# Altium PCB SWMD_21DD_ LV_DR_Brush_V1.1.pcbdoc (part 2 of 2)
Units mm, origin at the board's own origin, x right, y up, seen from the top; angles counter-clockwise.
Board outline 127.72 x 40.81 mm, 4 copper layers (Top Layer, MidLayer1, MidLayer2, Bottom Layer); 125 components, 86 nets, 396 pads, 310 vias.
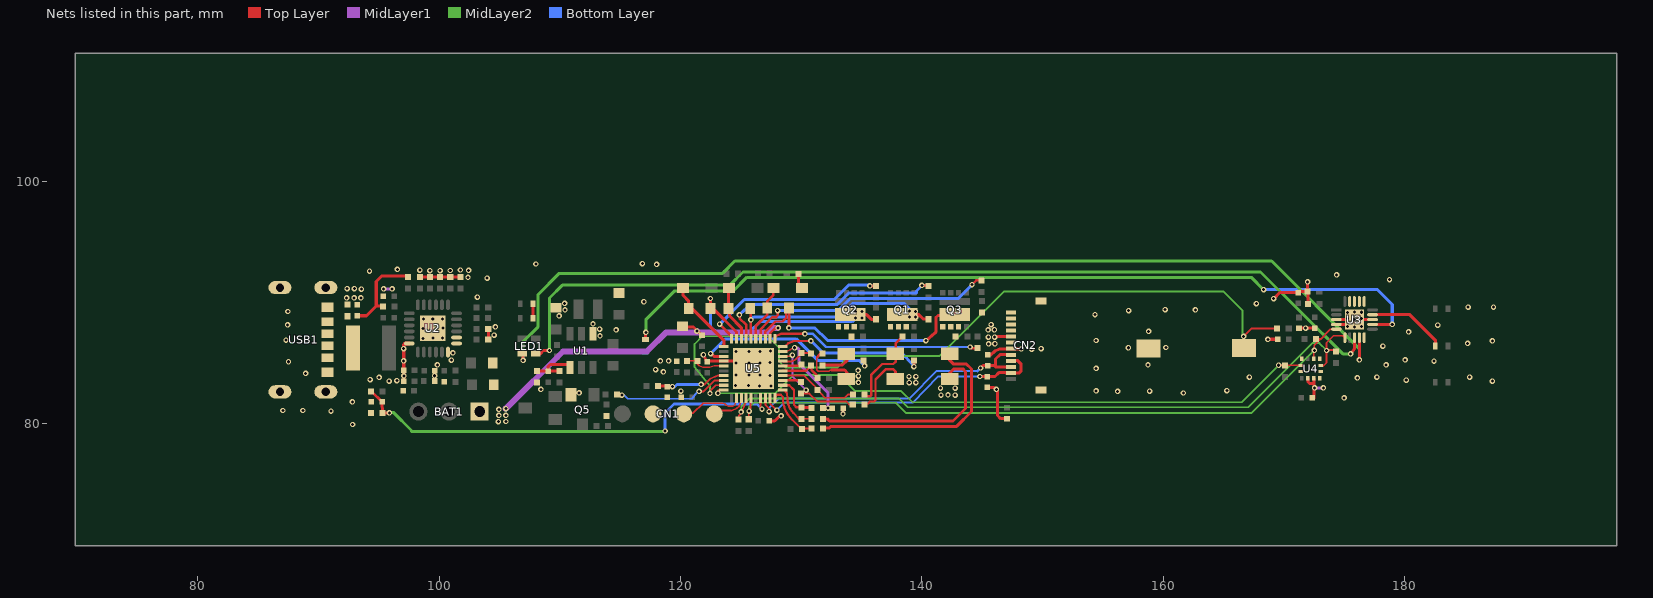
[diagram p4: the nets of this part, all layers, seen from the top]

## Via types
v1: diameter 0.45, hole 0.25, Top Layer to Bottom Layer, 310 vias

## Nets (pads, with @x,y where several pads share a name; then routed paths per layer and width w, separated by ;. In a path a pad name is that pad's centre, name@x,y a point inside that pad or via, vN(x,y) a via of type N, cw(c..) or ccw(c..) an arc to the next point about the centre after c; other vN are vias at no path point) (continued)
$$$39: LED1.1 U3.8 | length 77.2
  Top Layer w0.25: LED1.1@108.008,85.783 108.337,85.783 108.37,85.75 108.65,86.03 v1(109.14,86.03) ; v1(175.52,85.76) 175.52,85.722 175.838,86.15 U3.8@175.838,87.096
  MidLayer2 w0.25: v1(109.14,86.03) 109.14,90.379 110.201,91.44 124.08,91.44 125.18,92.54 168.061,92.54 174.879,85.76 v1(175.52,85.76)
$$$40: LED1.4 U3.9 | length 81.5
  Top Layer w0.25: LED1.4@106.886,85.783 106.96,85.709 v1(106.96,85.21) ; U3.9@176.238,87.096 176.24,87.094 v1(176.24,85.26)
  MidLayer2 w0.25: v1(106.96,85.21) 106.96,86.77 108.2,88.01 108.2,90.68 109.95,92.43 123.49,92.43 124.5,93.44 168.98,93.44 176.24,86.18 v1(176.24,85.26)
$$$41: LED3.2 U3.14 | length 6.5
  Top Layer w0.25: U3.14@177.336,88.995 180.419,88.995 182.533,86.88 LED3.2@182.533,86.406
$$$42: LED5.2 U3.12 | length 69.2
  Top Layer w0.25: LED5.2@117.104,86.948 117.104,87.524 v1(117.12,87.54) ; U3.12@177.336,88.195 178.965,88.195 v1(178.97,88.19)
  MidLayer2 w0.25: v1(117.12,87.54) 117.12,88.581 119.519,90.98 124.38,90.98 125.49,92.09 167.29,92.09 v1(168.31,91.07)
  Bottom Layer w0.25: v1(168.31,91.07) 177.74,91.07 178.97,89.84 v1(178.97,88.19)
BUTTON: R30.2 SW1.1 U5.19 | length 122
  Top Layer w0.15: SW1.1@166.701,86.233 166.701,87.169 v1(166.66,87.21) 167.301,87.851 R30.2@169.434,87.851 ; v1@122.42,82.642 122.93,83.152 ; v1@122.42,82.642 122.44,82.46 v1@122.42,82.642 ; v1@122.42,82.642 122.93,83.152 ; 122.93,83.152 U5.19@123.582,83.152 122.93,83.152
  Top Layer w0.25: v1@122.44,82.46 v1(122.44,82.48) v1@122.44,82.46
  MidLayer2 w0.15: 121.16,84.64 122.44,83.1 ; 121.16,84.64 121.16,86.56 ; 121.16,84.64 122.44,83.1 ; 121.16,84.64 121.16,86.56 ; 121.16,86.56 121.81,87.21 ; 121.16,86.56 121.81,87.21 ; 121.81,87.21 127.21,87.21 ; 121.81,87.21 127.21,87.21 ; 122.44,83.1 v1(122.44,82.48) 122.44,83.1 ; 127.21,87.21 128.16,86.26 ; 127.21,87.21 128.16,86.26 ; 128.16,85.14 128.16,86.26 ; 128.16,85.14 128.68,84.62 ; 128.16,85.14 128.16,86.26 ; 128.16,85.14 128.68,84.62 ; 128.68,84.62 133.03,84.62 ; 128.68,84.62 133.03,84.62 ; 133.03,84.62 133.99,85.58 ; 133.03,84.62 133.99,85.58 ; 133.99,85.58 141.48,85.58 ; 133.99,85.58 141.48,85.58 ; 141.48,85.58 146.83,90.93 ; 141.48,85.58 146.83,90.93 ; 146.83,90.93 164.98,90.93 ; 146.83,90.93 164.98,90.93 ; 164.98,90.93 166.57,89.34 ; 164.98,90.93 166.57,89.34 ; v1@166.57,87.26 166.57,89.34 ; v1@166.57,87.26 v1@166.61,87.26 ; v1@166.57,87.26 166.57,89.34 ; v1@166.57,87.26 v1@166.61,87.26 ; v1@166.61,87.26 v1(166.66,87.21) v1@166.61,87.26
CAP: R36.2 R37.2 U5.15 | length 3.4
  Top Layer w0.12: R37.2@120.53,85.17 121.38,85.17 R36.2@121.39,85.16 121.36,85.13 121.36,84.97 121.56,84.769 121.849,84.65 122.42,84.65 122.79,84.752 U5.15@123.582,84.752
COM: Q3.5 Q3.6 Q3.7 R12.1 R19.1 R21.1 R25.1 RS1.1 RS2.1 RS3.2 | length 29.5
  Top Layer w0.12: 131.39,85.55 131.3,85.46 131.3,85.19 131.3,84.43 131.43,84.3 132.3,84.3 132.41,84.41 132.523,84.41
  Top Layer w0.2: R12.1@131.635,85.725 R12.1@131.77,85.8 ; R21.1@135.23,81.57 135.282,81.64 135.55,81.64 135.69,81.78 135.7,81.78 135.727,81.808 136.053,81.808 136.155,81.91 136.155,83.615 137.035,84.495 137.605,84.495 137.8,84.3
  Top Layer w0.25: 131.39,85.55 131.565,85.725 R12.1@131.635,85.725 ; R25.1@131.8,79.56 131.82,79.61 132.33,79.61 132.47,79.75 142.88,79.75 144.1,80.97 144.1,84.49 143.66,84.93 142.59,84.93 142.3,85.22 RS3.2@142.3,85.76 ; 132.523,84.41 133.6,84.41 133.81,84.15 133.73,84.07 RS2.1@133.73,83.655 ; RS1.1@137.8,83.66 137.8,84.3
  other v1: 138.95,83.37 139.5,83.37 134.73,83.39 138.93,83.86 139.49,83.86 134.73,83.91 134.72,84.39
DC-ADC: C30.2 R40.2 R41.1 U5.27 | length 37.4
  Top Layer w0.15: U5.27@126.632,82.102 126.632,81.21 v1(126.75,81.18)
  Top Layer w0.25: R41.1@94.35,82.63 94.43,82.6 95.2,81.85 C30.2@95.28,81.77 R40.2@95.31,80.85 95.32,80.86 v1(95.88,80.86)
  MidLayer2 w0.25: v1(95.88,80.86) 95.93,80.91 96.2,80.91 97.71,79.4 97.71,79.34 118.72,79.34 v1(118.72,79.36)
  Bottom Layer w0.25: v1(118.72,79.36) 118.72,80.86 119.45,81.59 126.34,81.59 v1(126.75,81.18)
FB: C8.2 RCB3.1 RCB7.2 U1.4 | length 4.3
  Top Layer w0.25: RCB7.2@108.11,84.34 108.14,84.33 RCB3.1@109.98,84.33 ; C8.2@109.03,84.31 109.03,84.7 109.21,84.88 110.66,84.88 110.84,84.7 U1.4@110.84,84.629
GND: BAT1.1 C2.1 C3.1 C4.1 C5.2 C6.2 C7.1 C9.2 C10.2 C12.2 C13.2 C14.2 C15.2 C16.1 C17.1 C18.1 C22.2 C23.2 C24.1 C25.2 C26.2 C27.1 C28.1 C29.2 C30.1 C31.2 C32.2 C33.2 C34.2 C35.2 CN1.2 CN2.0 CN2.0/2 CN2.6 LED6.2 LED7.2 Q5.2 R15.2 R20.2 R27.1 R40.1 R45.2 RCB6.2 RCB7.1 RCB8.2 RCB12.2 RCB13.2 RCB14.2 RCB15.2 RCB16.2 RCB17.2 RS3.1 SW1.2 U1.1 U2.0 U2.18 U2.24 U3.3 U3.4 U3.13 U3.13/2 U4.8 U4.9 U5.2 U5.14 U5.41 USB1.7 USB1.7/2 USB1.7/3 USB1.7/4 USB1.A12 USB1.B12 | length 131.1
  Top Layer w0.2: U5.2@127.432,87.21 127.432,87.482 127.9,87.95 v1@128.03,87.95 ; v1@128.03,87.95 128.09,87.95 v1@128.03,87.95
  Top Layer w0.22: v1@128.03,87.95 v1(128.08,87.9)
  Top Layer w0.25: C3.1@97.06,84.387 97.058,84.468 C3.1@97.06,84.47 ; RCB15.2@98.42,92.14 RCB16.2@101.77,92.14 ; RCB6.2@104.07,86.94 RCB8.2@104.07,87.82 ; LED7.2@107.768,88.7 LED6.2@107.768,89.9 ; C18.1@120.157,88.042 120.073,87.983 121.08,87.983 v1@121.35,87.714 ; C17.1@121.778,87.285 v1@121.35,87.714 ; U5.2@127.432,87.002 U5.2@127.432,87.21 ; R27.1@131.8,80.37 132.15,80.37 132.33,80.19 142.58,80.19 143.62,81.23 143.62,84.28 143.39,84.51 142.65,84.51 142.3,84.16 RS3.1@142.3,83.66 ; C34.2@145.42,82.97 145.97,82.97 146.27,82.67 146.27,80.65 146.54,80.38 C35.2@147.05,80.38 ; C33.2@145.46,85.68 145.643,85.68 145.683,85.64 146.071,86.008 146.43,86.157 CN2.6@147.38,86.177 ; C14.2@171.242,87.866 171.255,87.879 v1(171.8,87.88) C15.2@172.563,87.879 ; U4.8@171.97,83.727 171.97,83.46 172.15,83.281 172.47,83.281 ; R20.2@171.979,89.888 171.979,90.911 R15.2@171.962,90.928 ; C32.2@172.341,82.122 172.408,82.122 172.47,82.06 v1@172.47,82.93 ; U4.9@172.47,83.727 172.47,83.281 ; U3.4@174.339,88.195 175.39,88.195 U3.13@175.795,88.6 ; U3.3@174.339,88.595 175.79,88.595 U3.13@175.795,88.6 ; v1@121.35,87.714 v1(121.35,87.63) v1@121.35,87.714 ; v1@121.93,85.647 C25.2@122.125,85.174 ; v1@121.93,85.647 v1(121.89,85.68) v1@121.93,85.647 ; v1@121.93,85.647 C25.2@122.125,85.174 ; C25.2@122.125,85.174 C25.2@122.2,85.1 ; C25.2@122.125,85.174 C25.2@122.2,85.1 ; C25.2@122.2,85.1 122.252,85.152 U5.14@123.582,85.152 ; U5.14@123.582,85.152 U5.41@124.5,85.152 ; U5.14@123.582,85.152 U5.41@124.5,85.152 ; U5.41@124.5,85.152 U5.41@124.6,85.052 ; U5.41@124.5,85.152 U5.41@124.6,85.052 ; U5.41@124.6,85.052 v1(124.6,84.99) U5.41@124.6,85.052 ; 127.8,80.196 C28.1@127.357,80.196 127.8,80.196 ; 127.8,80.196 v1@128.21,80.606 ; 127.8,80.196 v1@128.21,80.606 ; v1@128.21,80.606 v1@128.326,80.606 ; v1@128.21,80.606 v1@128.326,80.606 ; v1@128.326,80.606 v1(128.33,80.61) v1@128.326,80.606 ; v1@133.48,80.78 133.48,81.252 v1@133.48,80.78 ; v1@133.48,80.78 v1(133.46,80.78) v1@133.48,80.78 ; CN2.6@147.38,86.177 v1@148.213,86.177 ; CN2.6@147.38,86.177 v1@148.213,86.177 ; v1@148.213,86.177 v1(148.23,86.16) v1@148.213,86.177 ; v1@168.663,86.964 C23.2@169.481,86.964 v1@168.663,86.964 ; v1@168.663,86.964 v1(168.66,86.96) v1@168.663,86.964 ; C31.2@171.193,90.831 169.65,90.831 C31.2@171.193,90.831 ; C31.2@171.193,90.831 171.291,90.928 R15.2@171.962,90.928 ; R15.2@171.962,90.928 v1@171.962,91.718 ; R15.2@171.962,90.928 v1@171.962,91.718 ; v1@171.962,91.718 v1(171.96,91.72) v1@171.962,91.718 ; v1@172.47,82.93 172.47,83.281 ; v1@172.47,82.93 v1(172.54,82.93) ; v1@172.47,82.93 172.47,83.281 ; v1@172.47,82.93 v1(172.54,82.93) ; v1@172.47,82.93 v1(172.54,82.93) ; U3.13@175.795,88.6 U3.13@175.838,88.595 ; U3.13@175.795,88.6 v1(175.81,88.6) U3.13@175.795,88.6 ; U3.13@175.795,88.6 U3.13@175.838,88.595 ; U3.13@175.795,88.6 U3.13@175.838,88.595 ; U3.13@175.795,88.6 U3.13@175.838,88.595 ; U3.13@176.49,88.595 U3.13/2@177.336,88.595 U3.13@176.49,88.595 ; U3.13@176.49,88.595 U3.13@176.49,88.62 ; U3.13@176.49,88.595 U3.13@176.49,88.62 ; U3.13@176.49,88.62 v1(176.42,88.69) U3.13@176.49,88.62 ; v1(169.14,90.32) 169.65,90.83 v1(169.14,90.32)
  Top Layer w0.3: C7.1@97.058,83.478 97.058,84.468 C3.1@97.06,84.387 ; C3.1@97.06,84.47 97.06,86.49 97.179,86.609 U2.18@97.524,86.609
  MidLayer1 w0.25: v1@128.07,87.91 v1(128.08,87.9) ; v1(95.4,91.14) v1(96.1,91.14) v1(95.4,91.14) ; v1(133.46,80.78) 133.48,80.78 v1(133.46,80.78) ; v1(171.8,87.88) 171.81,87.88 v1(171.8,87.88) ; v1(172.54,82.93) v1(173.27,82.93) v1(172.54,82.93)
  MidLayer1 w0.5: v1@128.07,87.91 127.58,87.91 127.21,87.54 121.44,87.54 v1(121.35,87.63) ; v1(105.52,81.21) 110.26,85.95 ; v1(105.52,81.21) 110.26,85.95 ; v1(105.52,81.21) 110.26,85.95 ; 110.26,85.95 117.21,85.95 ; 110.26,85.95 117.21,85.95 ; 110.26,85.95 117.21,85.95 ; 117.21,85.95 118.8,87.54 ; 117.21,85.95 118.8,87.54 ; 117.21,85.95 118.8,87.54 ; 118.8,87.54 v1@121.35,87.54 ; 118.8,87.54 v1@121.35,87.54 ; 118.8,87.54 v1@121.35,87.54 ; v1@121.35,87.54 v1(121.35,87.63) ; v1@121.35,87.54 v1(121.35,87.63) ; v1@121.35,87.54 v1(121.35,87.63)
  other v1: 92.83,79.9 104.91,80.13 105.52,80.15 104.94,80.66 105.53,80.66 133.46,80.78 91.04,81 87.05,81.06 88.7,81.06 104.95,81.16 105.52,81.21 92.81,81.77 174.98,82.11 141.58,82.34 142.16,82.35 142.75,82.34 161.67,82.51 111.6,82.53 120.03,82.66 156.21,82.64 158.86,82.66 154.44,82.69 165.27,82.71 108.42,82.81 146.17,82.82 141.54,82.92 142.76,82.92 172.54,82.93 172.54,82.93 172.54,82.93 124.56,83.12 126.54,83.11 127.51,83.11 125.63,83.13 95.85,83.5 187.27,83.49 96.49,83.54 180.13,83.57 94.29,83.62 176.08,83.76 95.02,83.8 167.13,83.83 177.69,83.83 185.38,83.82 97.08,83.93 99.63,83.94 127.43,83.96 124.59,84 125.66,84.01 126.57,83.99 88.94,84.13 118.57,84.26 117.93,84.45 154.44,84.55 99.85,84.84 158.73,84.84 178.47,84.84 125.67,85 126.58,84.98 127.43,85.03 87.52,85.1 182.43,85.15 97.05,85.17 118.33,85.18 119.02,85.18 101.01,85.24 180.03,85.25 101.14,85.83 126.57,85.94 124.59,85.95 125.66,85.96 127.46,86 149.09,86.15 97.06,86.19 149.87,86.19 157.1,86.26 160.22,86.28 178.19,86.39 185.21,86.62 187.27,86.83 154.44,86.86 87.31,86.89 98.65,87.04 99.48,87.05 100.29,87.06 113.33,87.24 104.56,87.3 180.33,87.58 121.35,87.63 158.78,87.62 114.67,87.74 113.29,87.8 98.66,87.87 171.8,87.88 100.3,87.91 104.65,87.99 175.83,87.99 175.26,88 176.42,88.02 87.44,88.15 182.74,88.13 112.75,88.23 98.69,88.64 99.47,88.64 100.29,88.65 175.28,88.7 109.95,88.9 154.34,89.01 175.27,89.19 175.83,89.21 176.41,89.2 87.47,89.26 157.12,89.34 110.43,89.39 162.66,89.39 160.16,89.42 185.25,89.63 187.36,89.63 167.71,89.92 110.39,89.94 116.96,90.07 92.34,90.39 92.96,90.39 93.51,90.39 103.16,90.45 93.56,91.11 95.4,91.14 92.37,91.15 92.97,91.15 178.74,91.91 103.97,92.02 102.39,92.09 174.37,92.3 94.23,92.6 99.23,92.65 100.08,92.65 100.92,92.66 102.44,92.67 98.4,92.69 101.76,92.7 96.54,92.75 118.02,93.16 108.02,93.2 116.84,93.22
HALLA: C33.1 CN2.3 CN2.5 U5.28 | length 25.9
  Top Layer w0.154: U5.28@127.032,82.102 127.032,81.538 127.36,81.21 127.36,80.97 v1(127.34,80.97)
  Top Layer w0.25: v1(144.87,84.58) 145.07,84.78 C33.1@145.46,84.78 ; CN2.3@147.38,84.677 146.1,84.677 ; CN2.5@147.38,85.677 146.926,85.69 146.47,85.69 146.1,85.32 146.1,84.677 ; C33.1@145.46,84.78 145.997,84.78 ; C33.1@145.46,84.78 145.997,84.78 ; 145.997,84.78 146.1,84.677 ; 145.997,84.78 146.1,84.677
  MidLayer1 w0.154: v1(127.34,80.97) 127.36,80.97 v1(127.34,80.97)
  Bottom Layer w0.154: v1(127.34,80.97) 127.36,80.97 127.36,81.27 128.13,82.04 138.95,82.04 141.245,84.335 144.61,84.335
  Bottom Layer w0.25: 144.61,84.335 144.855,84.58 v1(144.87,84.58)
  other v1: 127.34,80.97
HALLB: C34.1 CN2.2 CN2.4 U5.29 | length 26.5
  Top Layer w0.154: U5.29@127.432,82.102 127.432,81.638 v1(127.98,81.09)
  Top Layer w0.25: v1(144.8,83.88) 144.82,83.86 145.14,83.86 145.16,83.88 146.06,83.88 ; CN2.4@147.38,85.177 147.4,85.177 147.413,85.19 147.952,85.19 148.2,84.942 148.2,84.61 148.2,84.31 148.073,84.183 146.945,84.183 CN2.2@147.38,84.177 146.926,84.19 146.37,84.19 146.06,83.88 ; 146.06,83.88 C34.1@145.42,83.87 146.06,83.88
  Bottom Layer w0.154: v1(127.98,81.09) 128.6,81.71 139.23,81.71 141.37,83.88 v1(144.8,83.88)
HB1: C21.1 D14.2 U5.11 | length 6.5
  Top Layer w0.25: D14.2@120.2,91.2 120.22,91.18 120.22,90.58 120.68,90.12 C21.1@120.68,89.5 120.68,89.56 120.731,89.611 120.851,89.611 123.582,86.88 U5.11@123.582,86.352
HB2: C20.1 D13.2 U5.8 | length 4.6
  Top Layer w0.25: D13.2@124,91.2 123.98,91.18 C20.1@123.98,89.5 124.052,89.428 124.052,88.9 125.032,87.92 U5.8@125.032,87.002
HB3: C19.1 D12.2 U5.5 | length 4.8
  Top Layer w0.22: U5.5@126.232,87.002 126.232,88.042 127.19,89 127.19,89.329 127.22,89.359 127.214,89.394 127.214,89.525 C19.1@127.19,89.55 127.19,90.12 127.69,90.62 127.69,91.19 D12.2@127.7,91.2
INT: R38.1 U4.5 U5.20 | length 52
  Top Layer w0.15: v1(123.09,82.49) 123.09,82.722 123.2,82.752 U5.20@123.582,82.752 ; v1(169.56,84.81) R38.1@170.077,84.81 ; R38.1@170.077,84.808 171.384,84.808 U4.5@171.404,84.788
  MidLayer2 w0.15: v1(123.09,82.49) 123.09,82.59 123.221,82.49 127.84,82.49 128.76,83.41 129.38,84.01 133.14,84.01 134.48,82.67 138.29,82.67 139.22,81.74 166.49,81.74 v1(169.56,84.81)
IU: Q2.5 Q2.6 Q2.7 R8.1 R10.1 RS2.2 | length 2.8
  Top Layer w0.25: R10.1@131.77,84.8 131.788,84.797 131.815,84.823 133.423,84.823 133.78,85.18 133.78,85.705 RS2.2@133.73,85.755
IV: Q1.5 Q1.6 Q1.7 R7.1 R17.1 RS1.2 | length 7.2
  Top Layer w0.2: R17.1@135.24,82.39 135.3,82.39 135.32,82.385 135.46,82.245 135.71,82.235 135.795,82.32 135.795,83.995 136.71,84.91 137.62,84.91 137.84,85.13 137.84,86.64 R7.1@138.4,87.2 ; RS1.2@137.53,85.43 137.58,85.43 RS1.2@137.53,85.43
L3V3: R43.2 U5.18 | length 9.3
  Top Layer w0.15: v1(121.55,82.65) 121.55,82.641 121.919,82.641 122.83,83.552 U5.18@123.582,83.552
  Bottom Layer w0.15: v1(115.14,82.34) 115.16,82.36 115.28,82.36 115.58,82.06 115.58,82.03 120.95,82.03 121.44,82.65 v1(121.55,82.65)
NET_R32_2: D12.1 R32.2 | length 1.4
  Top Layer w0.25: R32.2@129.76,92.385 129.76,91.29 129.97,91.29 D12.1@130.06,91.2
OC: C16.2 R24.2 U5.39 | length 9.1
  Top Layer w0.12: U5.39@128.482,85.952 128.824,85.969 129.09,86.09 129.32,86.27 v1(129.45,86.26)
  Top Layer w0.25: R24.2@131.81,81.25 C16.2@132.53,81.25 ; v1(132.22,81.26) C16.2@132.53,81.25 ; v1(132.22,81.26) C16.2@132.53,81.25 ; v1(132.22,81.26) C16.2@132.53,81.25 ; C16.2@132.53,81.25 C16.2@132.579,81.254 C16.2@132.53,81.25
  MidLayer1 w0.25: v1(129.45,86.26) 129.5,86.26 129.505,86.255 129.665,86.255 129.83,86.09 129.83,84.92 132.22,82.53 v1(132.22,81.26)
  other v1: 132.22,81.26
OPA0+: R23.1 R25.2 U5.30 | length 4.9
  Top Layer w0.18: U5.30@127.832,82.102 127.832,82.182 128.01,82.36 128.31,82.36 128.48,82.19 128.48,82.099 ccw(c130.965,82.099) 129.208,80.342 129.93,79.62 R23.1@130.07,79.53 130.07,79.56 R25.2@130.84,79.56
OPA0-: R26.2 R27.2 U5.31 | length 4
  Top Layer w0.18: U5.31@128.482,82.752 128.588,82.752 128.785,82.555 128.785,82.525 128.83,82.48 128.87,82.01 ccw(c130.485,82.01) 129.343,80.868 129.79,80.38 R26.2@130.04,80.36 130.85,80.39 R27.2@130.84,80.37
OPA0-OUT: R24.1 R26.1 U5.32 | length 3.9
  Top Layer w0.2: U5.32@128.482,83.152 129.01,83.152 129.4,82.762 129.4,81.54 129.62,81.32 R26.1@130.04,81.32
  Top Layer w0.3: R26.1@130.04,81.32 130.84,81.29 R24.1@130.85,81.25
OPA1+: R16.1 R17.2 U5.34 | length 6.9
  Top Layer w0.15: U5.34@128.482,83.952 130.238,83.952 130.752,83.438 131.026,83.17 131.932,82.11 133.62,82.11 133.9,82.39 R17.2@134.28,82.39 ; R16.1@131.33,82.77 R16.1@131.338,82.932
OPA1-: R21.2 R22.2 U5.38 | length 9.6
  Top Layer w0.15: U5.38@128.482,85.552 129.06,85.552 v1(129.26,85.65) ; v1(130.4,82.75) 130.4,82.45 R22.2@129.97,82.45 129.98,82.46 130.68,82.46 131.33,81.81 133.72,81.81 133.96,81.57 R21.2@134.27,81.57
  MidLayer1 w0.15: v1(129.26,85.65) 129.265,85.645 129.265,83.885 v1(130.4,82.75)
OPA1-OUT: R22.1 U5.33 | length 1.6
  Top Layer w0.2: U5.33@128.482,83.552 129.86,83.552 129.97,83.442 R22.1@129.97,83.41
OPA2+: R9.1 R10.2 U5.35 | length 3.8
  Top Layer w0.2: U5.35@128.482,84.352 130.4,84.352 R10.2@130.758,84.71 ; R9.1@131.35,83.76 131.35,83.92 130.85,84.42 130.85,84.618 R10.2@130.758,84.71 ; R10.2@130.758,84.71 R10.2@130.81,84.8 R10.2@130.758,84.71
OPA2-: R12.2 R14.2 U5.37 | length 2.7
  Top Layer w0.15: U5.37@128.482,85.152 128.482,85.12 129.184,85.12 129.518,85.259 130.03,85.773 R14.2@130.05,85.83 ; R12.2@130.81,85.8 130.78,85.83 R14.2@130.05,85.83 ; R14.2@130.05,85.83 R14.2@130.03,85.83 R14.2@130.05,85.83
OPA2-OUT: R14.1 U5.36 | length 1.6
  Top Layer w0.2: U5.36@128.482,84.752 129.868,84.752 R14.1@130.03,84.87
SCL: R29.2 R31.2 U3.6 U4.12 U5.24 | length 62.2
  Top Layer w0.15: U5.24@125.432,82.102 125.432,81.802 125.162,81.15 125.094,81.082 125.094,81.058 125.072,81.036 125.072,81.005 125.03,80.98 v1(125.03,80.95) ; v1(173.54,86.03) 173.53,86.03 v1@173.52,86.02 ; U3.6@175.038,87.096 174.874,87.26 174.1,87.26 173.52,86.68 v1@173.52,86.07 ; 124.822,80.612 R29.2@124.822,80.328 124.822,80.612 ; 124.822,80.612 v1@125.03,80.82 ; 124.822,80.612 v1@125.03,80.82 ; v1@125.03,80.82 v1(125.03,80.95) ; v1@125.03,80.82 v1(125.03,80.95) ; U4.12@173.222,84.788 U4.12@173.037,84.788 U4.12@173.222,84.788 ; U4.12@173.222,84.788 173.26,84.75 ; U4.12@173.222,84.788 173.26,84.75 ; 173.26,84.75 173.52,85.01 ; 173.26,84.75 173.52,85.01 ; 173.52,85.01 v1@173.52,86.02 ; 173.52,85.01 v1@173.52,86.02 ; v1@173.52,86.02 v1@173.52,86.07 ; v1@173.52,86.07 R31.2@174.28,86.07 ; v1@173.52,86.07 R31.2@174.28,86.07 ; R31.2@174.28,86.07 R31.2@174.297,86.053 ; R31.2@174.28,86.07 R31.2@174.297,86.053 ; R31.2@174.297,86.053 R31.2@174.297,85.956 R31.2@174.297,86.053
  MidLayer2 w0.15: v1(125.03,80.95) 125.03,81.37 125.72,82.06 138.08,82.06 138.81,81.33 167.03,81.33 172.34,86.64 172.93,86.64 v1(173.54,86.03)
  other v1: 125.03,80.95
SDA: R28.1 R33.1 U3.5 U4.2 U5.25 | length 57.8
  Top Layer w0.15: v1@125.7,81.05 v1@125.686,81.036 ; U4.2@172.47,85.349 v1@172.47,85.869 ; v1(172.51,86.04) 172.51,86.46 173.026,86.976 ; 173.028,86.978 173.844,87.795 U3.5@174.339,87.795 ; v1@125.654,80.914 R28.1@125.654,80.334 v1@125.654,80.914 ; v1@125.654,80.914 v1@125.711,80.971 ; v1@125.654,80.914 v1@125.711,80.971 ; v1(125.68,81) v1@125.686,81.036 ; v1(125.68,81) v1@125.686,81.036 ; v1(125.68,81) v1@125.711,80.971 ; v1(125.68,81) 125.686,80.996 125.686,81.02 v1@125.686,81.036 ; v1(125.68,81) v1@125.686,81.036 ; v1(125.68,81) v1@125.686,81.036 ; v1(125.68,81) v1@125.711,80.971 ; v1@125.686,81.036 v1@125.686,81.114 ; v1@125.686,81.036 v1@125.686,81.114 ; v1@125.686,81.114 v1@125.7,81.128 ; v1@125.686,81.114 v1@125.7,81.128 ; v1@125.7,81.128 v1@125.7,81.138 ; v1@125.7,81.128 v1@125.7,81.138 ; v1@125.7,81.138 125.802,81.24 ; v1@125.7,81.138 125.802,81.24 ; 125.802,81.24 U5.25@125.802,81.8 ; 125.802,81.24 U5.25@125.802,81.8 ; U5.25@125.802,81.8 U5.25@125.832,81.83 ; U5.25@125.802,81.8 U5.25@125.832,81.83 ; U5.25@125.832,81.83 U5.25@125.832,82.102 U5.25@125.832,81.83 ; 173.026,86.976 R33.1@172.64,86.976 173.026,86.976
  MidLayer2 w0.15: v1(125.68,81) 125.68,81.34 126.05,81.71 137.82,81.71 138.67,80.86 167.33,80.86 v1(172.51,86.04)
  other v1: 125.68,81 125.68,81 125.68,81
SWCLK: CN1.3 U5.22 | length 5.3
  Top Layer w0.12: CN1.3@120.263,80.78 120.303,80.82 121.02,80.82 121.88,81.68 123.488,81.68 123.645,81.615 123.797,81.483 123.939,81.424 124.322,81.424 124.482,81.49 124.591,81.753 124.591,81.859 124.632,81.9 U5.22@124.632,82.102
SWDIO: CN1.4 U5.23 | length 3
  Top Layer w0.15: CN1.4@122.803,80.78 123.073,81.05 124.208,81.05 124.672,81.242 124.857,81.427 125.032,81.849 U5.23@125.032,82.102
U: C21.2 CN2.7 CN2.8 Q2.10 R4.2 U5.9 | length 57.6
  Top Layer w0.25: U5.9@124.632,87.002 124.632,87.57 122.702,89.5 C21.2@122.48,89.5 ; Q2.10@134.066,89.001 135.42,89.001 135.81,88.611 136.201,88.611 R4.2@136.21,88.62 ; C21.2@122.48,89.5 v1(122.48,90.34) ; C21.2@122.48,89.5 v1(122.48,90.34) ; C21.2@122.48,89.5 v1(122.48,90.34) ; v1(146.03,87.14) v1@146.03,87.177 ; v1(146.03,87.14) v1@146.03,87.177 ; v1(146.03,87.14) v1@146.03,87.177 ; v1@146.03,87.177 CN2.8@147.38,87.177 ; v1@146.03,87.177 CN2.8@147.38,87.177 ; v1@146.03,87.177 CN2.8@147.38,87.177
  Bottom Layer w0.25: 122.48,88.02 v1(122.48,90.34) ; 122.48,88.02 122.96,87.54 ; 122.48,88.02 v1(122.48,90.34) ; 122.48,88.02 122.96,87.54 ; 122.48,88.02 v1(122.48,90.34) ; 122.48,88.02 122.96,87.54 ; 122.96,87.54 125.7,87.54 ; 122.96,87.54 125.7,87.54 ; 122.96,87.54 125.7,87.54 ; 125.7,87.54 126.58,88.42 ; 125.7,87.54 126.58,88.42 ; 125.7,87.54 126.58,88.42 ; 126.58,88.42 134.22,88.42 ; 126.58,88.42 134.22,88.42 ; 126.58,88.42 134.22,88.42 ; 134.22,88.42 v1(134.51,88.71) ; 134.22,88.42 v1(134.51,88.71) ; 134.22,88.42 v1(134.51,88.71)
  other v1: 145.52,86.58 146.05,86.59 145.5,87.13 146.03,87.14 146.03,87.14 134.51,88.71 135.04,88.72 134.49,89.26 135.02,89.27
U1-RST: C26.1 R39.2 U5.17 | length 5.8
  Top Layer w0.15: v1(121.71,83.22) 121.7,83.22 121.705,83.225 121.995,83.225 122.457,83.687 123.097,83.952 U5.17@123.582,83.952
  Top Layer w0.25: R39.2@118.14,83.09 118.85,83.09 C26.1@118.9,83.04 v1(119.33,83.04)
  Bottom Layer w0.25: v1(119.33,83.04) 119.45,83.04 119.49,83 119.71,83.22 v1(121.71,83.22)
U-H: R2.1 U5.10 | length 16.1
  Top Layer w0.25: v1(123.24,88.21) v1@123.27,88.18 ; v1@123.272,88.18 124.232,87.22 U5.10@124.232,87.002 ; v1(135.68,91.38) 136.2,91.38 R2.1@136.2,91.37
  MidLayer1 w0.25: v1(123.24,88.21) 123.27,88.18 v1(123.24,88.21)
  Bottom Layer w0.25: v1(123.24,88.21) 125.29,90.26 132.74,90.26 133.93,91.45 135.63,91.45 135.68,91.4 v1(135.68,91.38)
  other v1: 123.24,88.21
U-L: R6.1 U5.13 | length 16
  Top Layer w0.25: v1(122.49,85.77) 122.552,85.77 122.77,85.552 U5.13@123.582,85.552 ; R6.1@135.157,85.216 135.25,85.123 v1(135.25,84.76)
  MidLayer1 w0.25: v1(122.49,85.77) 122.55,85.77 v1(122.49,85.77)
  Bottom Layer w0.25: v1(122.49,85.77) 123.72,87 129.58,87 131.36,85.22 134.79,85.22 v1(135.25,84.76)
  other v1: 122.49,85.77
V: C20.2 CN2.9 CN2.10 Q1.10 R3.1 U5.6 | length 32.9
  Top Layer w0.22: C20.2@125.78,89.5 125.832,89.237 v1@125.832,88.61 ; U5.6@125.832,87.002 v1@125.832,88.61 ; v1@125.832,88.61 v1(125.82,88.57) v1@125.832,88.61
  Top Layer w0.25: Q1.10@138.376,89.001 139.74,89.001 140.09,88.651 140.499,88.651 R3.1@140.53,88.62
  Bottom Layer w0.25: 126.07,88.82 v1(125.82,88.57) 126.07,88.82 ; 126.07,88.82 133.14,88.82 ; 126.07,88.82 133.14,88.82 ; 133.14,88.82 134.24,89.92 ; 133.14,88.82 134.24,89.92 ; 134.24,89.92 138.54,89.92 ; 134.24,89.92 138.54,89.92 ; 138.54,89.92 139.06,89.4 138.54,89.92
  other v1: 145.48,87.74 146.01,87.75 145.74,88.17 125.82,88.57 138.99,88.8 139.48,88.8 139.47,89.28 138.98,89.3
V-H: R1.1 U5.7 | length 19.1
  Top Layer w0.22: v1(124.88,88.99) 124.9,88.99 124.902,88.988 124.902,88.7 125.432,88.17 U5.7@125.432,87.002 ; v1(140,91.42) 140.53,91.42 R1.1@140.53,91.37
  MidLayer1 w0.22: v1(124.88,88.99) 124.9,88.99 v1(124.88,88.99)
  Bottom Layer w0.25: v1(124.88,88.99) 125.812,89.85 132.99,89.85 133.93,90.79 139.55,90.79 139.55,90.97 v1(140,91.42)
  other v1: 124.88,88.99
V-L: R5.1 U5.40 | length 12.4
  Top Layer w0.2: U5.40@128.482,86.352 128.64,86.352 128.919,86.631 129.375,86.82 v1(130.8,86.83)
  Top Layer w0.25: R5.1@139.327,85.208 139.34,85.065 v1(139.34,84.7)
  Bottom Layer w0.25: v1(130.8,86.83) 131.175,86.455 131.185,86.455 131.82,85.82 138.324,85.82 138.623,85.521 v1(139.34,84.7)
VIN: C12.1 L2.1 RCB9.2 RCB12.1 RCB18.2 USB1.A9 USB1.B9 | length 9.3
  Top Layer w0.25: RCB9.2@95.34,89.66 95.28,89.72 94.789,89.72 ; RCB18.2@97.43,92.14 97.38,92.19 95.229,92.19 94.789,91.75 94.789,89.72 ; 93.98,88.911 94.789,89.72 ; 93.98,88.911 C12.1@93.214,88.911 93.98,88.911 ; 93.98,88.911 94.789,89.72
W: C19.2 CN2.11 CN2.12 Q3.10 R13.1 U5.3 | length 70.1
  Top Layer w0.2: U5.3@127.032,87.002 127.032,87.602 127.865,88.435 128.44,88.435 128.74,88.735 128.74,89.31 128.811,89.381 128.972,89.438 C19.2@128.99,89.55
  Top Layer w0.25: v1(128.98,87.91) 128.99,88.75 ; v1(128.98,87.91) 128.99,88.75 ; v1(128.98,87.91) 128.99,88.75 ; v1(128.98,87.91) 128.99,88.75 ; 128.99,88.75 C19.2@128.99,89.55 ; 128.99,88.75 C19.2@128.99,89.55 ; 128.99,88.75 C19.2@128.99,89.55 ; 128.99,88.75 C19.2@128.99,89.55 ; v1(140.33,86.85) 141.15,87.56 ; v1(140.33,86.85) 141.15,87.56 ; v1(140.33,86.85) 141.15,87.56 ; v1(140.33,86.85) 141.15,87.56 ; 141.15,87.56 141.15,88.76 ; 141.15,87.56 141.15,88.76 ; 141.15,87.56 141.15,88.76 ; 141.15,87.56 141.15,88.76 ; 141.15,88.76 141.33,88.94 ; 141.15,88.76 141.33,88.94 ; 141.15,88.76 141.33,88.94 ; 141.15,88.76 141.33,88.94 ; 141.33,88.94 Q3.10@141.71,88.94 ; 141.33,88.94 Q3.10@141.71,88.94 ; 141.33,88.94 Q3.10@141.71,88.94 ; 141.33,88.94 Q3.10@141.71,88.94 ; Q3.10@141.71,88.94 Q3.10@141.89,88.76 ; Q3.10@141.71,88.94 Q3.10@141.89,88.76 ; Q3.10@141.71,88.94 Q3.10@141.89,88.76 ; Q3.10@141.71,88.94 Q3.10@141.89,88.76
  Bottom Layer w0.25: v1(128.98,87.91) 131.09,87.91 ; v1(128.98,87.91) 131.09,87.91 ; v1(128.98,87.91) 131.09,87.91 ; v1(128.98,87.91) 131.09,87.91 ; 131.09,87.91 132.187,86.874 ; 131.09,87.91 132.187,86.874 ; 131.09,87.91 132.187,86.874 ; 131.09,87.91 132.187,86.874 ; 132.187,86.874 v1@140.306,86.874 ; 132.187,86.874 v1@140.306,86.874 ; 132.187,86.874 v1@140.306,86.874 ; 132.187,86.874 v1@140.306,86.874 ; v1@140.306,86.874 v1(140.33,86.85) ; v1@140.306,86.874 v1(140.33,86.85) ; v1@140.306,86.874 v1(140.33,86.85) ; v1@140.306,86.874 v1(140.33,86.85) ; v1(140.33,86.85) 140.35,86.83 v1(140.33,86.85)
  other v1: 140.33,86.85
W-H: R11.1 U5.4 | length 21
  Top Layer w0.2: U5.4@126.632,87.002 126.632,87.782 127.601,88.799 127.92,88.799 128.07,88.949 128.07,89.29 128.05,89.31 v1(128.05,89.33) ; v1(144.15,91.48) 144.516,91.846 R11.1@144.942,91.846
  Bottom Layer w0.25: v1(128.05,89.33) 133.05,89.33 134.06,90.34 143.01,90.34 v1(144.15,91.48)
W-L: R18.1 U5.1 | length 17.5
  Top Layer w0.2: U5.1@127.832,87.14 127.926,87.234 128.351,87.41 v1(130.31,87.41) ; v1(143.99,86.32) 144.09,86.22 R18.1@144.595,86.22
  Top Layer w0.25: U5.1@127.832,87.002 U5.1@127.832,87.14
  Bottom Layer w0.2: v1(130.31,87.41) 130.97,87.41 132.06,86.32 v1(143.99,86.32)
"": U2.1 U2.2 U3.10 U3.16 U3.17 U3.18 U3.19 U4.1 U4.4 U4.6 U4.10 U4.11 USB1.A5 USB1.B5

## Polygon pours and split planes (outlines as drawn)
GND on Bottom Layer (solid, remove dead copper, pour order 0): 78.25,96.33 190.22,96.33 190.22,76.8 78.25,76.8
GND on Top Layer (solid, remove dead copper, pour order 1): 78.5,96.21 190.47,96.21 190.47,76.68 78.5,76.68
GND on MidLayer1 (solid, remove dead copper, pour order 2): 76.2,94.6 190.4,94.6 190.4,76.2 76.2,76.2
GND on MidLayer2 (solid, remove dead copper, pour order 3): 78.95,94.98 191.22,94.98 191.22,76.26 78.95,76.26

## Keep-outs
Top Layer:
  region net "": 102.87,85.55 106.65,85.55 106.65,79.64 102.87,79.64
  region net "": 93.57,88.26 93.57,84.19 95.22,84.19 95.22,88.26
  region net "": 127.72,88.34 128.77,88.34 128.77,87.39 127.72,87.39
  region net "": 129.02,89.97 143.9,89.97 143.9,79.5 129.02,79.5
  region net "": 118.62,88.95 122.52,88.95 122.52,86.98 118.62,86.98
MidLayer1:
  region net "": 105.4,81.89 110.51,86.75 117.07,86.75 118.52,90.49 147.15,90.49 147.15,82.73 130.43,82.5 130.43,86.67 118.94,86.67 117,85 110.135,85 106.33,81.195 105.79,81.258
  region net "": 105.88,81.99 139.6,81.99 141.31,83.45 144.91,83.45 144.91,79.2 105.88,79.2
MidLayer2:
  region net "": 141.17,83.36 143.38,83.36 143.38,82.06 141.17,82.06
  region net "": 127.62,88.43 129.29,88.43 129.29,87.43 127.62,87.43
  region net "": 120.43,88.18 121.93,88.18 121.93,86.98 120.43,86.98
  region net "": 118.28,90.59 125.03,90.59 126.52,92.08 150.49,92.08 150.49,82.05 130.52,82.05 127.61,87.67 118.28,87.67
Bottom Layer:
  region net "": 141,83.35 143.61,83.35 143.61,81.21 141,81.21
  region net "": 120.52,88.1 122.5,88.1 122.5,85.74 120.52,85.74
  region net "": 127.1,88.38 129.01,88.38 129.01,87.12 127.1,87.12
Board Outline Layer:
  lines w0.1 net "": 176.313,93.074 ccw(c178.301,99.536) 178.112,92.778 179.701,92.778 cw(c179.701,92.367) 180.112,92.367 180.112,91.618 ccw(c180.427,91.618) 180.427,91.304 188.153,91.304 188.572,90.885 188.572,81.82 cw(c187.975,81.993) 188.034,81.374 185.372,81.374 185.372,82.533 ccw(c184.872,82.423) 184.372,82.533 184.372,81.379 180.552,81.379 ccw(c180.552,80.967) 180.139,80.967 180.139,80.422 cw(c179.511,80.524) 179.43,79.892 177.826,79.866 ccw(c178.605,71.302) 176.149,79.543 174.329,79.046 cw(c173.11,82.93) 173.154,78.859 123.312,78.859 123.312,79.485 ccw(c122.933,79.485) 122.933,79.863 119.999,79.863 ccw(c120,79.468) 119.605,79.469 119.605,78.861 96.647,78.861 96.647,79.736 ccw(c96.062,79.541) 95.478,79.736 95.478,78.861 91.318,78.861 91.318,79.403 ccw(c90.889,79.403) 90.889,79.832 88.006,79.832 ccw(c88.006,79.45) 87.625,79.45 87.625,78.861 85.845,78.861 cw(c85.845,79.229) 85.476,79.229 85.476,82.785 ccw(c85.115,82.785) 85.115,83.147 79.206,83.147 78.907,83.446 78.907,89.564 79.167,89.825 84.603,89.825 ccw(c84.603,90.132) 84.91,90.132 84.91,93.783 87.625,93.783 87.625,93.091 ccw(c87.927,93.091) 87.927,92.788 90.901,92.788 ccw(c90.901,93.195) 91.308,93.195 91.308,93.78 119.618,93.78 119.618,93.207 ccw(c119.984,93.207) 119.984,92.841 123.006,92.841 ccw(c123.006,93.125) 123.291,93.125 123.291,93.783 173.582,93.783 cw(c172.747,84.952) 176.313,93.074 ; 176.313,93.074 176.313,93.074
Multi-Layer:
  region net "": 151.905,83.375 151.905,89.3 cw(c152.442,89.28) 152.98,89.3 152.98,83.3 cw(c152.446,83.388)
  region net "": 152.926,89.466 ccw(c152.959,89.485) 152.993,89.503 ccw(c152.441,89.2) 151.889,89.503 ccw(c151.922,89.485) 151.956,89.466 cw(c152.441,89.2)
  region net "": 151.884,83.177 ccw(c151.922,83.177) 151.96,83.177 151.96,89.485 ccw(c151.922,89.485) 151.884,89.485
  region net "": 151.954,83.198 ccw(c151.922,83.177) 151.89,83.156 ccw(c152.441,83.515) 152.991,83.156 ccw(c152.959,83.177) 152.927,83.198 cw(c152.441,83.515)
  region net "": 152.921,83.177 ccw(c152.959,83.177) 152.997,83.177 152.997,89.485 ccw(c152.959,89.485) 152.921,89.485

## Other copper
Top Layer:
  region net 12V: 130.83,89.96 130.83,92.99 131.03,93.19 142.63,93.19 143.21,92.61 143.21,89.97 141.47,89.97 141.47,91.71 141.21,91.97 139.21,91.97 138.91,91.67 138.91,89.95 137.1,89.95 137.1,91.87 136.92,92.05 134.88,92.05 134.61,91.78 134.61,89.96
  region net IU: 132.88,88.24 132.88,85.25 134.52,85.25 134.52,88.24
  region net IV: 137.1,88.22 137.1,85.23 138.77,85.23 138.77,88.22
  region net COM: 141.51,88.24 141.51,85.38 143.2,85.38 143.2,88.24
  region net W: 141.5,89.51 147.82,89.51 147.82,88.63 141.5,88.63
  region net VIN: 90.02,88.89 91.52,88.86 91.84,89.18 93.45,89.18 93.45,87.59 92.25,87.59 91.95,88.09 90.02,88.09
  region net VIN: 88.75,88.87 91.54,88.87 91.54,88.1 89.7,88.1 89.7,85.75 91.28,85.75 91.28,84.92 88.75,84.92
  region net $$$16: 95.45,88.21 97.82,88.21 97.82,87.04 95.45,87.04
  region net $$$17: 97.55,86.28 98.79,86.28 98.79,85.44 98.15,84.8 98.15,83.15 97.55,83.15
  region net 12V: 99.14,86.3 99.14,85.4 98.48,84.74 98.48,83.28 97.58,82.38 97.58,80.3 99.13,80.3 99.13,84.67 99.8,85.34 99.8,86.3
  region net $$$27: 110.93,90.14 110.93,88.72 111.48,88.17 111.48,86.87 112.03,86.87 112.03,90.14
  region net 3V3: 113.38,89.54 115.29,89.54 115.29,88.88 113.38,88.88
  region net COM: 140.76,86.51 142.82,86.51 142.82,85.53 141.51,85.53 140.98,85 140.98,83.14 137.13,83.14 137.13,84.09 139.78,84.09 140.04,84.35 140.04,85.79
  region net COM: 133.04,84.13 134.44,84.13 134.44,84.55 134.89,84.55 134.89,83.3 134.72,83.13 133.04,83.13
  region net V: 145.32,88.36 147.79,88.36 147.79,87.52 145.32,87.52
  region net U: 145.33,87.35 147.74,87.35 147.74,86.53 145.33,86.53
  region net 12V: 97.71,82.79 101.58,82.79 101.91,83.12 101.91,86.31 105.3,86.31 105.3,85.64 103.32,85.64 103.32,82.92 102.42,82.02 99.77,82.02 99.23,81.48 99.23,80.26 97.71,80.26
MidLayer1:
  region net 12V: 101.53,86.73 101.53,85.03 105.35,85.03 106.95,86.63 106.95,89.76 107.95,90.76 133.4,90.76 133.4,93.1 123.78,93.1 123.26,92.58 105.83,92.58 105.4,92.15 105.4,87.52 104.61,86.73
Bottom Layer:
  region net COM: 134.47,84.58 134.47,83.11 139.71,83.11 139.71,84.03 134.93,84.03 134.93,84.58
  region net V: 138.64,89.6 145.72,89.6 146.2,89.12 146.2,87.59 145.29,87.59 144.33,88.58 138.64,88.58
  region net U: 134.17,89.48 135.48,89.48 136.8,88.35 144.04,88.35 145.23,87.31 146.29,87.31 146.29,86.4 144.75,86.4 143.64,87.32 134.17,87.32
  region net 12V: 130.83,92.52 130.83,90.7 132.65,90.7 133.11,91.18 133.39,91.46 133.39,92.5
  region net 12V: 101.76,86.45 105.34,86.45 105.34,85.32 101.76,85.32

## Silkscreen, mask and mechanical layers (free items; w line width, h text height)
Top Silkscreen Layer:
  circle w0.762 net "": c145.826,82.531 r0.074
  lines w0.05 net "": 146.61,85.68 146.64,85.7 ; 96.91,90.76 96.91,93.4 102.35,93.4 102.35,90.76 96.91,90.76 ; 115.23,82.56 116.77,82.56 116.77,81.62 119.41,81.62 119.41,83.63 115.23,83.63 115.23,82.56 ; 116.28,83.74 121.81,83.74 121.81,85.53 116.28,85.53 116.28,83.74 ; 118.13,86.54 119.23,85.56 122.25,85.56 122.25,87.45 123.19,88.25 123.19,90.61 118.13,90.61 118.13,86.54 ; 127.97,78.95 127.97,81.79 130.45,81.79 130.45,78.95 127.97,78.95 ; 129.3,82.01 129.34,81.97 130.46,81.97 130.46,80.84 134.39,80.84 134.39,78.95 138.72,78.95 138.72,81.8 137.1,81.8 137.1,81.1 133.87,81.1 133.87,82.7 132.69,82.7 132.69,84.22 130.82,84.22 130.82,84.23 129.3,84.23 129.3,82.01 ; 130.48,78.88 133.94,78.88 133.94,80.83 130.48,80.83 130.48,78.88
  lines w0.1 net "": 102.56,86.41 102.56,93.71 105.13,93.71 105.13,89.79 104.48,89.79 104.44,86.41 102.56,86.41 ; 105.21,82.42 107.74,82.42 107.74,82.83 110.43,82.83 110.43,84.78 105.21,84.78 105.21,82.42 ; 154.74,89.91 154.74,93.7 161.73,93.7 161.73,89.91 154.74,89.91
  lines w0.12 net "": 94.52,89.28 94.52,93.1 95.97,93.1 96.82,92.25 96.82,89.28 94.52,89.28 ; 106.07,87.77 108.42,87.77 108.42,92.74 106.07,92.74 106.07,87.77 ; 129.36,84.4 129.36,88.21 132.26,88.21 132.26,84.4 129.36,84.4 ; 166.88,88.91 166.88,92.24 169.5,92.24 169.5,89.26 173.25,89.26 173.25,86.47 170.82,86.47 170.82,88.91 166.88,88.91
  lines w0.2 net "": 106.16,85.283 106.16,87.463 108.536,87.463 108.536,85.283 106.16,85.283 ; 146.281,82.069 150.208,82.069 150.208,90.736 146.281,90.736 146.281,82.069
  text "A" at 156.85,92.66 h1.3
  text "A" at 99.1,92.51 h1.3
  text "G" at 150.56,85.79 h1.3
  text "SWMD_21DD_ LV_DR_Brush_V1.1" at 151.06,80.91 h1.3
  text "B+" at 95.77,80.56 h1.3
  text "C" at 118.89,80.4 h1.3
  text "D" at 121.43,80.38 h1.3
  text "V+" at 115.89,80.26 h1.3
  text "2024-2-26" at 150.87,79.19 h1.3
  text "GND" at 117.23,79.12 h1.3
  text "B-" at 104.82,79.02 h1.3
Top Paste Mask Layer:
  region net "": 91.238,84.624 91.238,83.824 90.238,83.824 90.238,84.624
  region net "": 91.238,85.774 91.238,85.074 90.238,85.074 90.238,85.774
  region net "": 91.238,86.774 91.238,86.074 90.238,86.074 90.238,86.774
  region net "": 91.238,87.774 91.238,87.074 90.238,87.074 90.238,87.774
  region net "": 91.238,88.774 91.238,88.074 90.238,88.074 90.238,88.774
  region net "": 91.238,90.024 91.238,89.224 90.238,89.224 90.238,90.024
  region net "": 87.213,83.154 87.213,82.054 86.413,82.054 86.413,83.154
  region net "": 87.213,91.794 87.213,90.694 86.413,90.694 86.413,91.794
  region net "": 91.013,83.154 91.013,82.054 90.213,82.054 90.213,83.154
  region net "": 91.013,91.794 91.013,90.694 90.213,90.694 90.213,91.794
Mechanical Layer:
  lines w0.025 net "": 151.905,83.375 151.905,89.3 cw(c152.442,89.28) 152.98,89.3 152.98,83.3 cw(c152.446,83.388) 151.905,83.375
Mech15:
  drawing of 105 lines, arcs and shapes, not listed